# EAGLE board Current Sensor Board (EAGLE 7.1.0)
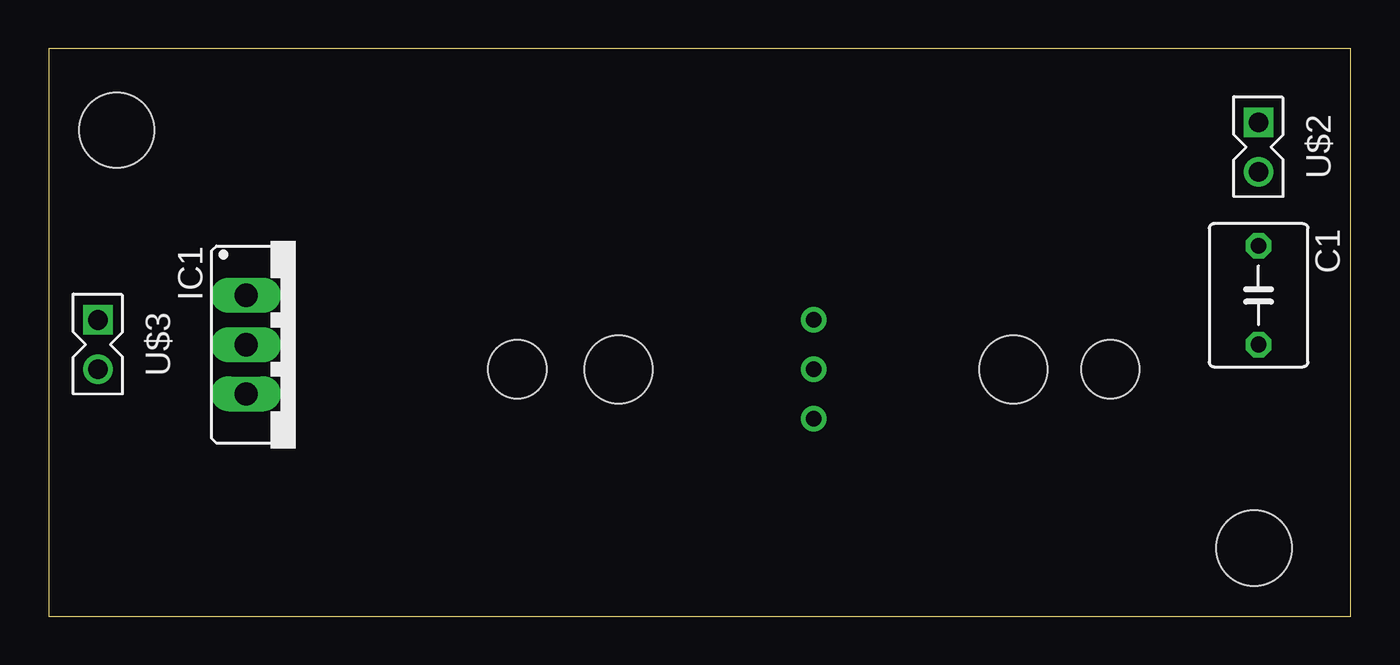
[diagram p0: board, top side]
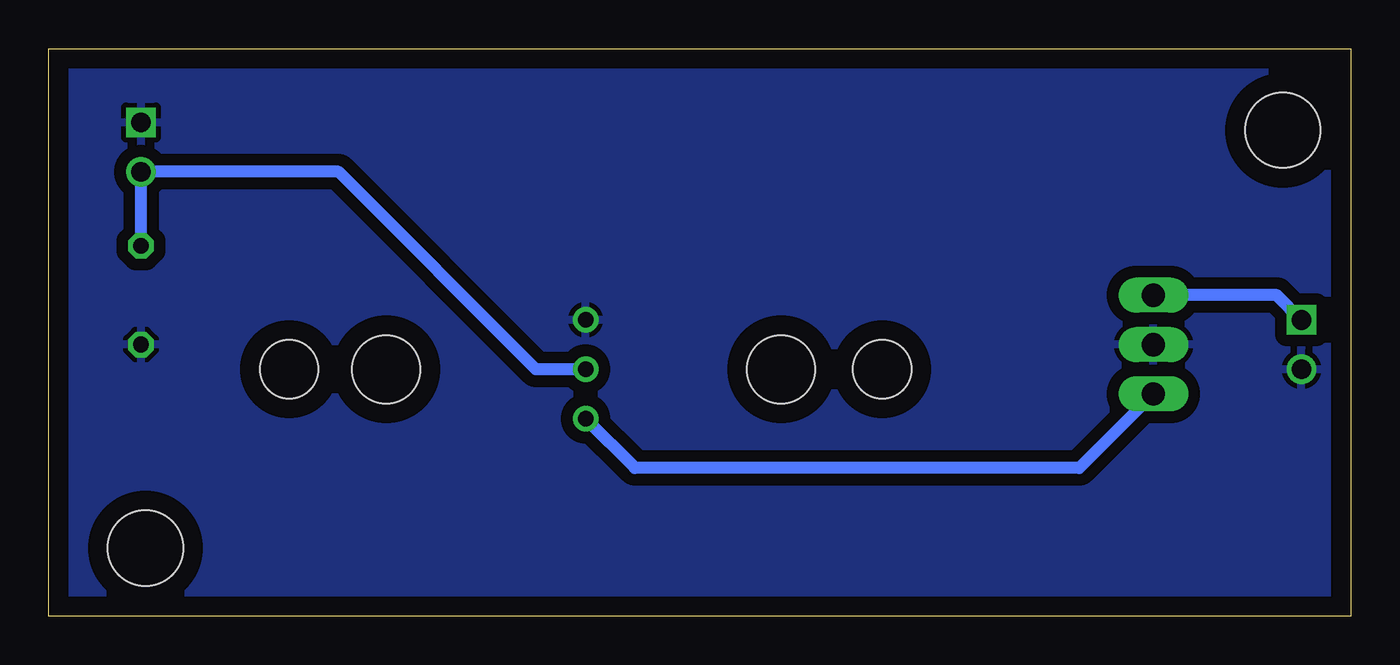
[diagram p1: board, bottom side, seen from below]

Size 66.98 x 29.2 mm. Coordinates in mm from the lower left corner, seen from the top.
Outline: 0,0 66.98,0 66.98,29.2 0,29.2 0,0
Copper layers (1*16): Top 0.035mm / dielectric 1.5mm / Bottom 0.035mm
Design rules "default": minimum track width 10mil, minimum drill 24mil, track to track 8mil, track to pad 8mil, pad to pad 8mil, via to via 8mil, smd to smd 8mil, copper to edge 40mil, drill to drill 8mil, minimum pad ring 10mil, minimum via ring 8mil, stop-mask expansion 4mil, vias tented up to drill 0mil, thermal gap 10mil
Holes 3.86 mm at 3.5,25 62,3.5

## Footprints (pad centres in the part's own frame; a part is rotated, then mirrored left to right if it is on the bottom)
C050-050X075 = drill 0.813 octagon: 1 -2.54,0; 2 2.54,0
78XXS = drill 1.2 long: GND 0,-2.54; IN -2.54,-2.54; OUT 2.54,-2.54
CSLA1DJ = drill 0.8: V0 15.25,0; V+ 15.25,2.54; V- 15.25,-2.54 | hole 3.5: 5,0; 25.3,0 | hole 3: 0,0; 30.5,0
1X2_100MIL = drill 1.016 square: 1 -2.54,0 | drill 1.016: 2 0,0

## Placement (x,y rotation side)
C1  [C050-050X075]  62.23,16.51 270 top
IC1  [78XXS]  12.7,13.97 270 top
U$1  CSLA1DJ  [CSLA1DJ]  54.61,12.7 180 top
U$2  1X2HEADER_100MIL  [1X2_100MIL]  62.23,22.86 270 top
U$3  1X2HEADER_100MIL  [1X2_100MIL]  2.54,12.7 270 top

## Library data of the parts
C1 = rcl
IC1 = v-reg
U$1 = Current Sensors
U$2 U$3 = Headers

## Nets
+12V: IC1.OUT U$1.V+
GND: C1.2 IC1.GND U$1.V- U$2.1 U$3.2
N$1: IC1.IN U$3.1
N$3: C1.1 U$1.V0 U$2.2

## Tracks (layer width: path | path; a pad name or v marks a point on that pad's centre or on a via)
+12V
  Bottom 0.61: IC1.OUT 13.97,7.62 36.83,7.62 U$1.V+
GND
  pour Bottom (isolate 0.61): 0,29.21 67.31,29.21 67.31,0 0,0
N$1
  Bottom 0.61: U$3.1 3.81,16.51 IC1.IN
N$3
  Bottom 0.61: U$1.V0 41.91,12.7 52.07,22.86 U$2.2 C1.1